# Altium PCB Cookie_Template.pcbdoc
Units mm, origin at the board's own origin, x right, y up, seen from the top; angles counter-clockwise.
Board outline 60.34 x 40.36 mm, 2 copper layers (Top Layer, Bottom Layer); 2 components, 108 nets, 244 pads, 120 vias.
Unrouted connection lines stored in the file: 4.
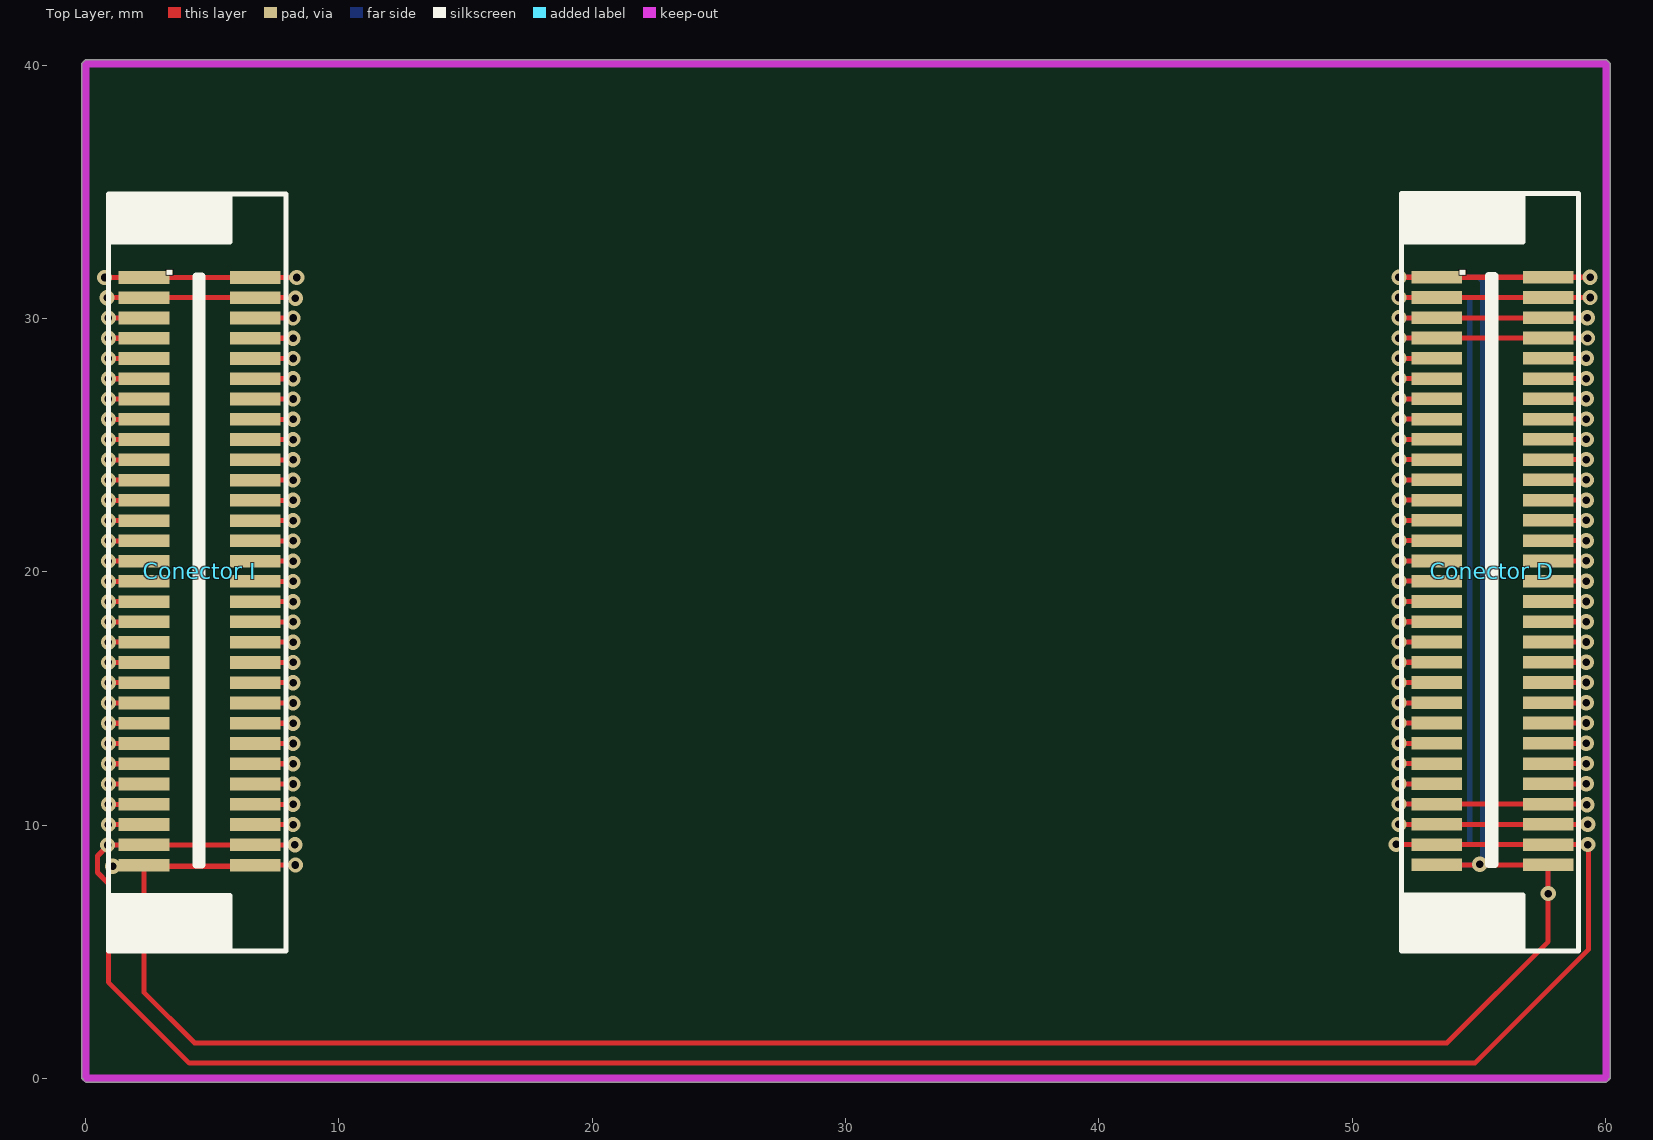
[diagram p0: Top Layer view]
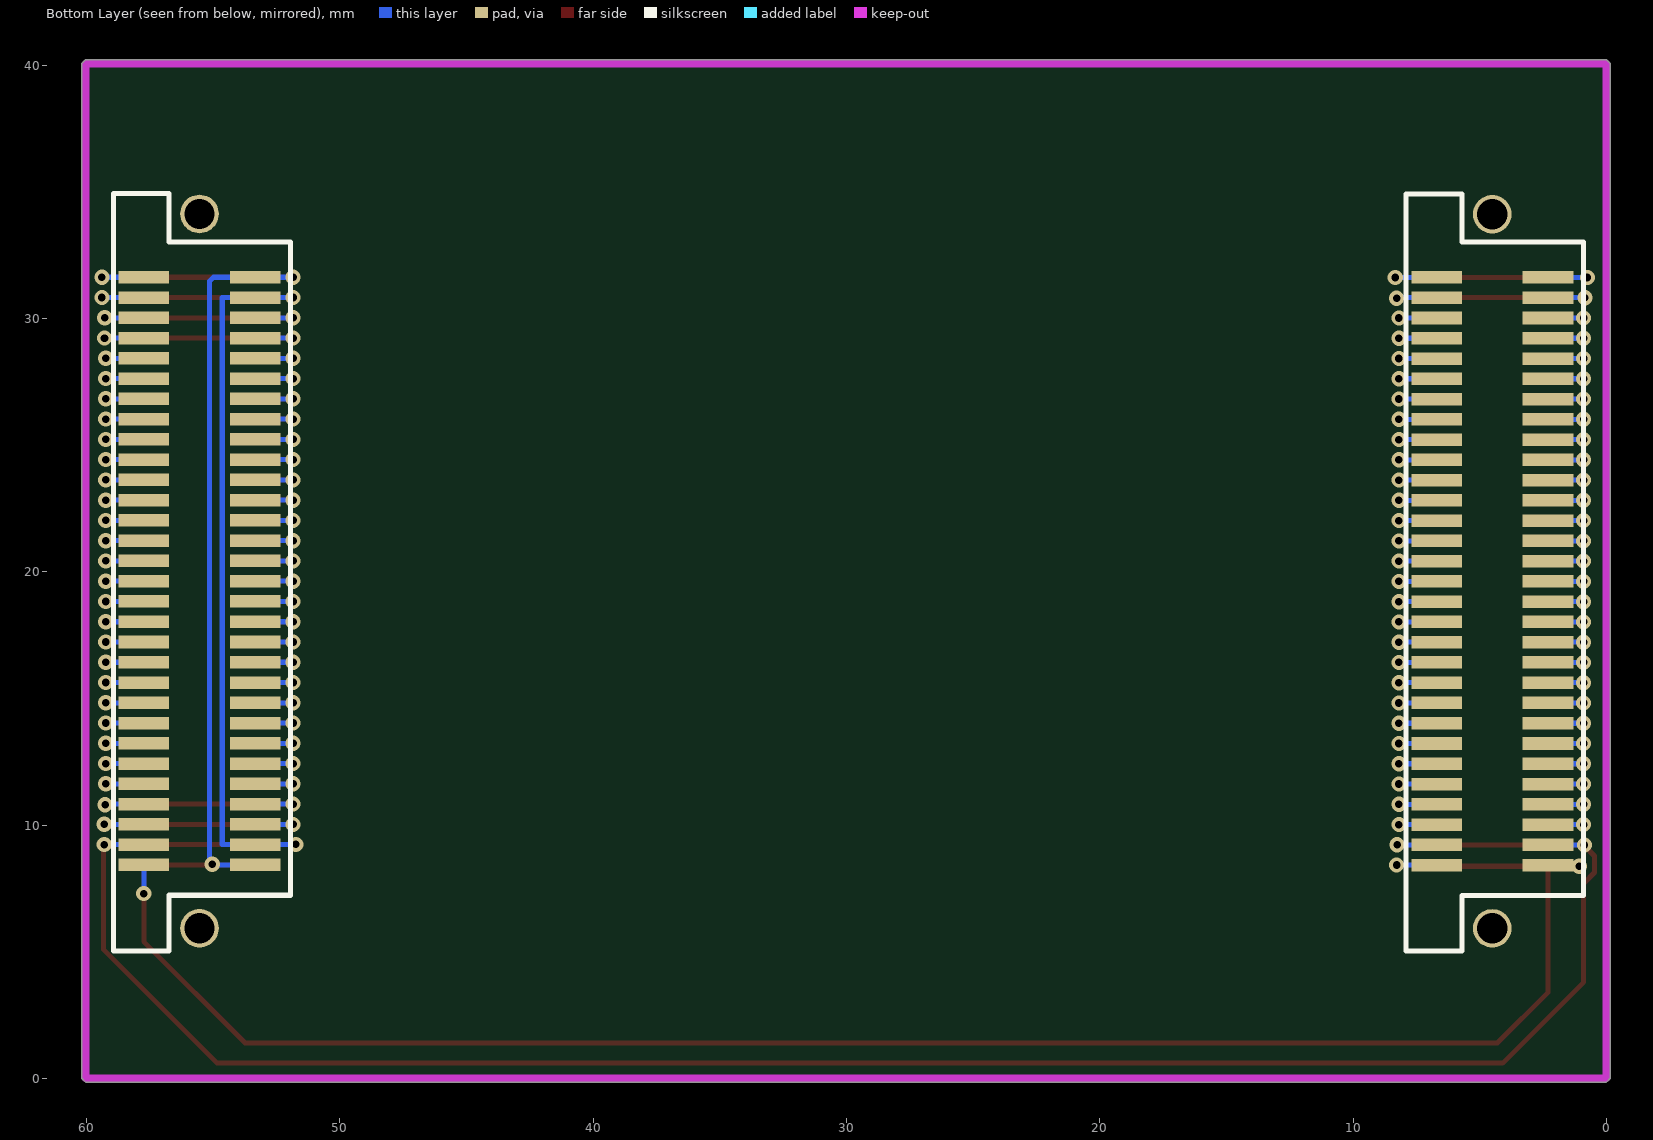
[diagram p1: Bottom Layer view, seen from below]

## Layer stack, top to bottom
Top Solder: solder mask 0.0102, Solder Resist, Dk 3.5
Top Layer: signal copper 0.0356
Dielectric1: dielectric 0.32, FR-4, Dk 4.8
Bottom Layer: signal copper 0.0356
Bottom Solder: solder mask 0.0102, Solder Resist, Dk 3.5

## Board outline
-0.15,0 0,-0.15 60.044,-0.15 60.194,0 60.194,40.063 60.044,40.213 0,40.213 -0.15,40.063

## Design rules (kind name [scope] priority, off if disabled: settings)
Clearance Clearance_2 [OnLayer('Bottom Layer') And (IsThruPin Or IsSMTPin Or IsWire) vs OnLayer('Bottom Layer') And (IsThruPin Or IsSMTPin Or IsWire Or IsVia)] p1: gap=0.2 ignorepadtopadclearanceinfootprint=FALSE except(0: Arc-Hole Track-Hole SMDPad-Hole THPad-Hole Via-Hole Fill-Hole Poly-Hole Region-Hole Text-Hole)
Clearance Clearance_1 [OnLayer('Top Layer') And (IsThruPin Or IsSMTPin Or IsWire Or IsVia) vs OnLayer('Top Layer') And (IsThruPin Or IsSMTPin Or IsWire Or IsVia)] p2: gap=0.2 ignorepadtopadclearanceinfootprint=FALSE except(0: Arc-Hole Track-Hole SMDPad-Hole THPad-Hole Via-Hole Fill-Hole Poly-Hole Region-Hole Text-Hole)
Clearance [All] p3: gap=0.15 ignorepadtopadclearanceinfootprint=FALSE except(0: Arc-Hole Track-Hole SMDPad-Hole THPad-Hole Via-Hole Fill-Hole Poly-Hole Region-Hole Text-Hole)
PlaneConnect [All] p1: planeconnectstyle=Relief reliefexpansion=0.635 reliefentries=4 reliefconductorwidth=0.305 reliefairgap=0.254
PolygonConnect [All] p1: connectstyle=Relief reliefconductorwidth=0.254 reliefentries=4 polygonreliefangle="90 Angle" airgapwidth=0.254
RoutingVias [All] p1: holewidth=0.711 width=1.27 viastyle="Through Hole" minholewidth=0.711 minwidth=1.27 maxholewidth=0.711 maxwidth=1.27
SolderMaskExpansion [All] p1: expansion=0 istentingtop=FALSE
Width Net_Width_8 [InNet('N76831')] p1: maxlimit=0.005 minlimit=0.005 preferedwidth=0.005
Width Net_Width_7 [InNet('I51') Or InNet('I52') Or InNet('I53') Or InNet('I54') Or InNet('I55') Or InNet('I56') Or InNet('I57') Or InNet('I58')] p2: maxlimit=0.2 minlimit=0.2 preferedwidth=0.2
Width Net_Width_6 [InNet('I35') Or InNet('I36') Or InNet('I37') Or InNet('I38') Or InNet('I39') Or InNet('I40') Or InNet('I41') Or InNet('I42') Or InNet('I43') Or InNet('I44') Or InNet('I45') Or InNet('I46') Or InNet('I47') Or InNet('I48') Or InNet('I49') Or InNet('I50')] p3: maxlimit=0.2 minlimit=0.2 preferedwidth=0.2
Width Net_Width_5 [InNet('I15') Or InNet('I16') Or InNet('I17') Or InNet('I18') Or InNet('I19') Or InNet('I20') Or InNet('I21') Or InNet('I22') Or InNet('I23') Or InNet('I24') Or InNet('I25') Or InNet('I26') Or InNet('I27') Or InNet('I28') Or InNet('I33') Or InNet('I34')] p4: maxlimit=0.2 minlimit=0.2 preferedwidth=0.2
Width Net_Width_4 [InNet('D55') Or InNet('D56') Or InNet('DGND') Or InNet('DVDD') Or InNet('I3') Or InNet('I4') Or InNet('I5') Or InNet('I6') Or InNet('I7') Or InNet('I8') Or InNet('I9') Or InNet('I10') Or InNet('I11') Or InNet('I12') Or InNet('I13') Or InNet('I14')] p5: maxlimit=0.2 minlimit=0.2 preferedwidth=0.2
Width Net_Width_3 [InNet('D39') Or InNet('D40') Or InNet('D41') Or InNet('D42') Or InNet('D43') Or InNet('D44') Or InNet('D45') Or InNet('D46') Or InNet('D47') Or InNet('D48') Or InNet('D49') Or InNet('D50') Or InNet('D51') Or InNet('D52') Or InNet('D53') Or InNet('D54')] p6: maxlimit=0.2 minlimit=0.2 preferedwidth=0.2
Width Net_Width_2 [InNet('D17') Or InNet('D18') Or InNet('D19') Or InNet('D20') Or InNet('D21') Or InNet('D22') Or InNet('D23') Or InNet('D24') Or InNet('D25') Or InNet('D26') Or InNet('D27') Or InNet('D28') Or InNet('D35') Or InNet('D36') Or InNet('D37') Or InNet('D38')] p7: maxlimit=0.2 minlimit=0.2 preferedwidth=0.2
Width Net_Width_1 [InNet('AGND') Or InNet('AVDD') Or InNet('D3') Or InNet('D4') Or InNet('D5') Or InNet('D6') Or InNet('D7') Or InNet('D8') Or InNet('D9') Or InNet('D10') Or InNet('D11') Or InNet('D12') Or InNet('D13') Or InNet('D14') Or InNet('D15') Or InNet('D16')] p8: maxlimit=0.2 minlimit=0.2 preferedwidth=0.2
Width [All] p9: maxlimit=0.203 minlimit=0.203 preferedwidth=0.203
29 further rules are at their usual default settings.

## Components (designator, comment, footprint, x,y, rotation, side; value= is the part's Value field where it differs from the comment)
"Conector D" "Cookie_Connector" COOKIECON_HEADER_AND_SOCKET 53.347,31.626 r270 top
"Conector I" "Cookie_Connector" COOKIECON_HEADER_AND_SOCKET 2.305,31.619 r270 top

## Footprints (in the part's own frame and the unit in brackets; to place one, negate y for a bottom-side part, rotate by r counter-clockwise, add the part's x,y. Pads: shape width x height; smd on the part's side, far side on the other; paste and mask are expansions set on the pad)
COOKIECON_HEADER_AND_SOCKET [mil]
  rect 19.63x78.73 smd: 1(0,0) 2(31.48,0) 3(63,0) 4(94.48,0) 5(126,0) 6(157.47,0) 7(188.97,0) 8(220.47,0) 9(251.97,0) 10(283.45,0) 11(314.95,0) 12(346.45,0) 13(377.95,0) 14(409.43,0) 15(440.93,0) 16(472.43,0) 17(503.93,0) 18(535.42,0) 19(566.92,0) 20(598.42,0) 21(629.92,0) 22(661.42,0) 23(692.9,0) 24(724.4,0) 25(755.9,0) 26(787.4,0) 27(818.88,0) 28(850.38,0) 29(881.88,0) 30(913.38,0) 31(913.38,173.22) 32(881.88,173.22) 33(850.38,173.22) 34(818.88,173.22) 35(787.4,173.22) 36(755.9,173.22) 37(724.4,173.22) 38(692.9,173.22) 39(661.42,173.22) 40(629.92,173.22) 41(598.42,173.22) 42(566.92,173.22) 43(535.42,173.22) 44(503.93,173.22) 45(472.43,173.22) 46(440.93,173.22) 47(409.43,173.22) 48(377.95,173.22) 49(346.45,173.22) 50(314.95,173.22) 51(283.45,173.22) 52(251.97,173.22) 53(220.47,173.22) 54(188.97,173.22) 55(157.47,173.22) 56(126,173.22) 57(94.48,173.22) 58(63,173.22) 59(31.48,173.22) 60(0,173.22)
  rect 19.47x78.73 smd far side: 61(0,173.22) 62(31.48,173.22) 63(63,173.22) 64(94.48,173.22) 65(126,173.22) 66(157.47,173.22) 67(188.97,173.22) 68(220.47,173.22) 69(251.97,173.22) 70(283.45,173.22) 71(314.95,173.22) 72(346.45,173.22) 73(377.95,173.22) 74(409.43,173.22) 75(440.93,173.22) 76(472.43,173.22) 77(503.93,173.22) 78(535.42,173.22) 79(566.92,173.22) 80(598.42,173.22) 81(629.92,173.22) 82(661.42,173.22) 83(692.9,173.22) 84(724.4,173.22) 85(755.9,173.22) 86(787.4,173.22) 87(818.88,173.22) 88(850.38,173.22) 89(881.88,173.22) 90(913.38,173.22) 91(913.38,0) 92(881.88,0) 93(850.38,0) 94(818.88,0) 95(787.4,0) 96(755.9,0) 97(724.4,0) 98(692.9,0) 99(661.42,0) 100(629.92,0) 101(598.42,0) 102(566.92,0) 103(535.42,0) 104(503.93,0) 105(472.43,0) 106(440.93,0) 107(409.43,0) 108(377.95,0) 109(346.45,0) 110(314.95,0) 111(283.45,0) 112(251.97,0) 113(220.47,0) 114(188.97,0) 115(157.47,0) 116(126,0) 117(94.48,0) 118(63,0) 119(31.48,0) 120(0,0)
  round 47.23 / inner round 60 / far side round 60 hole 47.23: 121(1011.8,86.6) 122(-98.42,86.6)
  silkscreen extent -130,-55 1047,220

## Via types
v1: diameter 0.6, hole 0.3, Top Layer to Bottom Layer, 120 vias

## Nets (pads, with @x,y where several pads share a name; then routed paths per layer and width w, separated by ;. In a path a pad name is that pad's centre, name@x,y a point inside that pad or via, vN(x,y) a via of type N, cw(c..) or ccw(c..) an arc to the next point about the centre after c; other vN are vias at no path point)
AGND: "Conector I.1" "Conector I.60" "Conector I.61" "Conector I.120" | length 10.8
  Top Layer w0.2: v1(0.751,31.619) 2.305,31.619 6.705,31.619 v1(8.341,31.619)
  Bottom Layer w0.2: v1(0.751,31.619) 2.305,31.619 ; 6.705,31.619 v1(8.341,31.619)
AVDD: "Conector I.2" "Conector I.59" "Conector I.62" "Conector I.119" | length 10.6
  Top Layer w0.2: v1(0.847,30.819) 2.305,30.819 6.705,30.819 8.303,30.819 v1(8.284,30.8)
  Bottom Layer w0.2: v1(0.847,30.819) 2.305,30.819 2.35,30.819 ; 6.705,30.819 v1@8.303,30.819 ; v1(8.284,30.8) v1@8.303,30.819 ; v1@8.328,30.819 v1@8.303,30.819
D3: "Conector D.3" "Conector D.118" | length 10.5
  Top Layer w0.2: v1(51.852,30.026) 53.347,30.026 v1(59.284,30.026)
  Bottom Layer w0.2: v1(51.852,30.026) 53.347,30.026 ; 57.746,30.026 v1(59.284,30.026)
D4: "Conector D.4" "Conector D.117" | length 10.5
  Top Layer w0.2: v1(51.852,29.227) 53.347,29.227 v1(59.296,29.227)
  Bottom Layer w0.2: v1(51.852,29.227) 53.347,29.227 ; 57.746,29.227 v1(59.296,29.227)
D5: "Conector D.5" "Conector D.116" | length 3
  Top Layer w0.2: v1(51.852,28.426) 53.347,28.426
  Bottom Layer w0.2: v1(51.852,28.426) 53.347,28.426
D6: "Conector D.6" "Conector D.115" | length 3
  Top Layer w0.2: v1(51.852,27.627) 53.347,27.627
  Bottom Layer w0.2: v1(51.852,27.627) 53.347,27.627
D7: "Conector D.7" "Conector D.114" | length 3
  Top Layer w0.2: v1(51.852,26.827) 53.347,26.827
  Bottom Layer w0.2: v1(51.852,26.827) 53.347,26.827
D8: "Conector D.8" "Conector D.113" | length 3
  Top Layer w0.2: v1(51.852,26.027) 53.347,26.027
  Bottom Layer w0.2: v1(51.852,26.027) 53.347,26.027
D9: "Conector D.9" "Conector D.112" | length 3
  Top Layer w0.2: v1(51.852,25.226) 53.347,25.226
  Bottom Layer w0.2: v1(51.852,25.226) 53.347,25.226
D10: "Conector D.10" "Conector D.111" | length 3
  Top Layer w0.2: v1(51.852,24.427) 53.347,24.427
  Bottom Layer w0.2: v1(51.852,24.427) 53.347,24.427
D11: "Conector D.11" "Conector D.110" | length 3
  Top Layer w0.2: v1(51.852,23.627) 53.347,23.627
  Bottom Layer w0.2: v1(51.852,23.627) 53.347,23.627
D12: "Conector D.12" "Conector D.109" | length 3
  Top Layer w0.2: v1(51.852,22.827) 53.347,22.827
  Bottom Layer w0.2: v1(51.852,22.827) 53.347,22.827
D13: "Conector D.13" "Conector D.108" | length 3
  Top Layer w0.2: v1(51.852,22.026) 53.347,22.026
  Bottom Layer w0.2: v1(51.852,22.026) 53.347,22.026
D14: "Conector D.14" "Conector D.107" | length 3
  Top Layer w0.2: v1(51.852,21.227) 53.347,21.227
  Bottom Layer w0.2: v1(51.852,21.227) 53.347,21.227
D15: "Conector D.15" "Conector D.106" | length 3
  Top Layer w0.2: v1(51.852,20.427) 53.347,20.427
  Bottom Layer w0.2: v1(51.852,20.427) 53.347,20.427
D16: "Conector D.16" "Conector D.105" | length 3
  Top Layer w0.2: v1(51.852,19.627) 53.347,19.627
  Bottom Layer w0.2: v1(51.852,19.627) 53.347,19.627
D17: "Conector D.17" "Conector D.104" | length 3
  Top Layer w0.2: v1(51.852,18.826) 53.347,18.826
  Bottom Layer w0.2: v1(51.852,18.826) 53.347,18.826
D18: "Conector D.18" "Conector D.103" | length 3
  Top Layer w0.2: v1(51.852,18.027) 53.347,18.027
  Bottom Layer w0.2: v1(51.852,18.027) 53.347,18.027
D19: "Conector D.19" "Conector D.102" | length 3
  Top Layer w0.2: v1(51.852,17.227) 53.347,17.227
  Bottom Layer w0.2: v1(51.852,17.227) 53.347,17.227
D20: "Conector D.20" "Conector D.101" | length 3
  Top Layer w0.2: v1(51.852,16.427) 53.347,16.427
  Bottom Layer w0.2: v1(51.852,16.427) 53.347,16.427
D21: "Conector D.21" "Conector D.100" | length 3
  Top Layer w0.2: v1(51.852,15.627) 53.347,15.627
  Bottom Layer w0.2: v1(51.852,15.627) 53.347,15.627
D22: "Conector D.22" "Conector D.99" | length 3
  Top Layer w0.2: v1(51.852,14.826) 53.347,14.826
  Bottom Layer w0.2: v1(51.852,14.826) 53.347,14.826
D23: "Conector D.23" "Conector D.98" | length 3
  Top Layer w0.2: v1(51.852,14.027) 53.347,14.027
  Bottom Layer w0.2: v1(51.852,14.027) 53.347,14.027
D24: "Conector D.24" "Conector D.97" | length 3
  Top Layer w0.2: v1(51.852,13.227) 53.347,13.227
  Bottom Layer w0.2: v1(51.852,13.227) 53.347,13.227
D25: "Conector D.25" "Conector D.96" | length 3
  Top Layer w0.2: v1(51.852,12.427) 53.347,12.427
  Bottom Layer w0.2: v1(51.852,12.427) 53.347,12.427
D26: "Conector D.26" "Conector D.95" | length 3
  Top Layer w0.2: v1(51.852,11.626) 53.347,11.626
  Bottom Layer w0.2: v1(51.852,11.626) 53.347,11.626
D27: "Conector D.27" "Conector D.94" | length 10.5
  Top Layer w0.2: v1(51.852,10.827) 53.347,10.827 59.243,10.827 v1(59.272,10.798)
  Bottom Layer w0.2: v1(51.852,10.827) 53.347,10.827 ; 57.746,10.827 59.243,10.827 v1(59.272,10.798)
D28: "Conector D.28" "Conector D.93" | length 10.5
  Top Layer w0.2: v1(51.852,10.027) 53.347,10.027 59.301,10.027 v1(59.305,10.031)
  Bottom Layer w0.2: v1(51.852,10.027) 53.347,10.027 ; 57.746,10.027 59.301,10.027 v1(59.305,10.031)
D33: "Conector D.33" "Conector D.88"
D34: "Conector D.34" "Conector D.87"
D35: "Conector D.35" "Conector D.86" | length 3
  Top Layer w0.2: 57.746,11.626 v1(59.245,11.626)
  Bottom Layer w0.2: 57.746,11.626 v1(59.245,11.626)
D36: "Conector D.36" "Conector D.85" | length 3
  Top Layer w0.2: 57.746,12.427 v1(59.245,12.427)
  Bottom Layer w0.2: 57.746,12.427 v1(59.245,12.427)
D37: "Conector D.37" "Conector D.84" | length 3
  Top Layer w0.2: 57.746,13.227 v1(59.245,13.227)
  Bottom Layer w0.2: 57.746,13.227 v1(59.245,13.227)
D38: "Conector D.38" "Conector D.83" | length 3
  Top Layer w0.2: 57.746,14.027 v1(59.245,14.027)
  Bottom Layer w0.2: 57.746,14.027 v1(59.245,14.027)
D39: "Conector D.39" "Conector D.82" | length 3
  Top Layer w0.2: 57.746,14.826 v1(59.245,14.826)
  Bottom Layer w0.2: 57.746,14.826 v1(59.245,14.826)
D40: "Conector D.40" "Conector D.81" | length 3
  Top Layer w0.2: 57.746,15.627 v1(59.245,15.627)
  Bottom Layer w0.2: 57.746,15.627 v1(59.245,15.627)
D41: "Conector D.41" "Conector D.80" | length 3
  Top Layer w0.2: 57.746,16.427 v1(59.245,16.427)
  Bottom Layer w0.2: 57.746,16.427 v1(59.245,16.427)
D42: "Conector D.42" "Conector D.79" | length 3
  Top Layer w0.2: 57.746,17.227 v1(59.245,17.227)
  Bottom Layer w0.2: 57.746,17.227 v1(59.245,17.227)
D43: "Conector D.43" "Conector D.78" | length 3
  Top Layer w0.2: 57.746,18.027 v1(59.245,18.027)
  Bottom Layer w0.2: 57.746,18.027 v1(59.245,18.027)
D44: "Conector D.44" "Conector D.77" | length 3
  Top Layer w0.2: 57.746,18.826 v1(59.245,18.826)
  Bottom Layer w0.2: 57.746,18.826 v1(59.245,18.826)
D45: "Conector D.45" "Conector D.76" | length 3
  Top Layer w0.2: 57.746,19.627 v1(59.245,19.627)
  Bottom Layer w0.2: 57.746,19.627 v1(59.245,19.627)
D46: "Conector D.46" "Conector D.75" | length 3
  Top Layer w0.2: 57.746,20.427 v1(59.245,20.427)
  Bottom Layer w0.2: 57.746,20.427 v1(59.245,20.427)
D47: "Conector D.47" "Conector D.74" | length 3
  Top Layer w0.2: 57.746,21.227 v1(59.245,21.227)
  Bottom Layer w0.2: 57.746,21.227 v1(59.245,21.227)
D48: "Conector D.48" "Conector D.73" | length 3
  Top Layer w0.2: 57.746,22.026 v1(59.245,22.026)
  Bottom Layer w0.2: 57.746,22.026 v1(59.245,22.026)
D49: "Conector D.49" "Conector D.72" | length 3
  Top Layer w0.2: 57.746,22.827 v1(59.245,22.827)
  Bottom Layer w0.2: 57.746,22.827 v1(59.245,22.827)
D50: "Conector D.50" "Conector D.71" | length 3
  Top Layer w0.2: 57.746,23.627 v1(59.245,23.627)
  Bottom Layer w0.2: 57.746,23.627 v1(59.245,23.627)
D51: "Conector D.51" "Conector D.70" | length 3
  Top Layer w0.2: 57.746,24.427 v1(59.245,24.427)
  Bottom Layer w0.2: 57.746,24.427 v1(59.245,24.427)
D52: "Conector D.52" "Conector D.69" | length 3
  Top Layer w0.2: 57.746,25.226 v1(59.245,25.226)
  Bottom Layer w0.2: 57.746,25.226 v1(59.245,25.226)
D53: "Conector D.53" "Conector D.68" | length 3
  Top Layer w0.2: 57.746,26.027 v1(59.245,26.027)
  Bottom Layer w0.2: 57.746,26.027 v1(59.245,26.027)
D54: "Conector D.54" "Conector D.67" | length 3
  Top Layer w0.2: 57.746,26.827 v1(59.245,26.827)
  Bottom Layer w0.2: 57.746,26.827 v1(59.245,26.827)
D55: "Conector D.55" "Conector D.66" | length 3
  Top Layer w0.2: 57.746,27.627 v1(59.245,27.627)
  Bottom Layer w0.2: 57.746,27.627 v1(59.245,27.627)
D56: "Conector D.56" "Conector D.65" | length 3
  Top Layer w0.2: 57.746,28.426 v1(59.245,28.426)
  Bottom Layer w0.2: 57.746,28.426 v1(59.245,28.426)
D57: "Conector D.57" "Conector D.64"
D58: "Conector D.58" "Conector D.63"
DGND: "Conector D.1" "Conector D.30" "Conector D.31" "Conector D.60" "Conector D.61" "Conector D.90" "Conector D.91" "Conector D.120" "Conector I.30" "Conector I.31" "Conector I.90" "Conector I.91" | length 119.1
  Top Layer w0.2: v1(1.07,8.372) 2.258,8.372 ; v1(8.284,8.423) 8.28,8.419 6.705,8.419 6.658,8.372 2.305,8.372 ; v1(51.852,31.626) 53.347,31.626 57.746,31.626 v1(59.4,31.626) ; 53.347,8.426 55.024,8.426 v1(55.045,8.448) 55.071,8.423 56.163,8.423 56.167,8.426 57.746,8.426 v1(57.746,7.294) 57.746,5.395 53.75,1.399 4.296,1.399 2.298,3.397 2.298,7.093 2.305,7.101 2.305,8.372 ; 2.258,8.372 2.305,8.419 2.305,8.372 ; 2.258,8.372 2.305,8.372
  Bottom Layer w0.2: v1(1.07,8.372) 2.258,8.372 2.305,8.419 ; 6.705,8.419 8.28,8.419 v1(8.284,8.423) ; v1(51.852,31.626) 53.347,31.626 54.993,31.626 55.148,31.471 55.148,8.551 v1(55.045,8.448) 55.067,8.426 53.347,8.426 ; v1(57.746,7.294) 57.746,8.426 ; 57.746,31.626 v1(59.4,31.626)
DVDD: "Conector D.2" "Conector D.29" "Conector D.32" "Conector D.59" "Conector D.62" "Conector D.89" "Conector D.92" "Conector D.119" "Conector I.29" "Conector I.32" "Conector I.89" "Conector I.92" | length 129.1
  Top Layer w0.2: v1(0.867,9.21) v1@0.899,9.21 ; v1(8.265,9.219) 6.705,9.219 2.305,9.219 ; v1(51.743,9.235) 51.734,9.227 53.347,9.227 57.746,9.227 v1(59.309,9.227) 59.345,9.227 59.345,5.095 54.849,0.599 4.096,0.599 0.899,3.796 0.899,7.69 0.467,8.122 0.467,8.778 v1@0.899,9.21 ; v1(51.852,30.827) 53.347,30.827 57.746,30.827 v1(59.4,30.827) ; v1@0.899,9.21 2.296,9.21 2.305,9.219 ; v1@0.899,9.21 0.899,9.219 2.305,9.219
  Bottom Layer w0.2: v1(0.867,9.21) 0.876,9.219 2.305,9.219 ; 6.705,9.219 v1(8.265,9.219) ; v1(51.743,9.235) 51.734,9.227 53.347,9.227 54.649,9.227 54.649,30.827 53.347,30.827 v1(51.852,30.827) ; 57.746,9.227 v1(59.309,9.227) ; 57.746,30.827 v1(59.4,30.827)
I3: "Conector I.3" "Conector I.118" | length 2.8
  Top Layer w0.2: v1(0.899,30.019) 2.305,30.019
  Bottom Layer w0.2: v1(0.899,30.019) 2.305,30.019
I4: "Conector I.4" "Conector I.117" | length 2.8
  Top Layer w0.2: v1(0.899,29.219) 2.305,29.219
  Bottom Layer w0.2: v1(0.899,29.219) 2.305,29.219
I5: "Conector I.5" "Conector I.116" | length 2.8
  Top Layer w0.2: v1(0.899,28.418) 2.305,28.418
  Bottom Layer w0.2: v1(0.899,28.418) 2.305,28.418
I6: "Conector I.6" "Conector I.115" | length 2.8
  Top Layer w0.2: v1(0.899,27.619) 2.305,27.619
  Bottom Layer w0.2: v1(0.899,27.619) 2.305,27.619
I7: "Conector I.7" "Conector I.114" | length 2.8
  Top Layer w0.2: v1(0.899,26.819) 2.305,26.819
  Bottom Layer w0.2: v1(0.899,26.819) 2.305,26.819
I8: "Conector I.8" "Conector I.113" | length 2.8
  Top Layer w0.2: v1(0.899,26.019) 2.305,26.019
  Bottom Layer w0.2: v1(0.899,26.019) 2.305,26.019
I9: "Conector I.9" "Conector I.112" | length 2.8
  Top Layer w0.2: v1(0.899,25.219) 2.305,25.219
  Bottom Layer w0.2: v1(0.899,25.219) 2.305,25.219
I10: "Conector I.10" "Conector I.111" | length 2.8
  Top Layer w0.2: v1(0.899,24.419) 2.305,24.419
  Bottom Layer w0.2: v1(0.899,24.419) 2.305,24.419
I11: "Conector I.11" "Conector I.110" | length 2.8
  Top Layer w0.2: v1(0.899,23.619) 2.305,23.619
  Bottom Layer w0.2: v1(0.899,23.619) 2.305,23.619
I12: "Conector I.12" "Conector I.109" | length 2.8
  Top Layer w0.2: v1(0.899,22.819) 2.305,22.819
  Bottom Layer w0.2: v1(0.899,22.819) 2.305,22.819
I13: "Conector I.13" "Conector I.108" | length 2.8
  Top Layer w0.2: v1(0.899,22.019) 2.305,22.019
  Bottom Layer w0.2: v1(0.899,22.019) 2.305,22.019
I14: "Conector I.14" "Conector I.107" | length 2.8
  Top Layer w0.2: v1(0.899,21.219) 2.305,21.219
  Bottom Layer w0.2: v1(0.899,21.219) 2.305,21.219
I15: "Conector I.15" "Conector I.106" | length 2.8
  Top Layer w0.2: v1(0.899,20.419) 2.305,20.419
  Bottom Layer w0.2: v1(0.899,20.419) 2.305,20.419
I16: "Conector I.16" "Conector I.105" | length 2.8
  Top Layer w0.2: v1(0.899,19.619) 2.305,19.619
  Bottom Layer w0.2: v1(0.899,19.619) 2.305,19.619
I17: "Conector I.17" "Conector I.104" | length 2.8
  Top Layer w0.2: v1(0.899,18.819) 2.305,18.819
  Bottom Layer w0.2: v1(0.899,18.819) 2.305,18.819
I18: "Conector I.18" "Conector I.103" | length 2.8
  Top Layer w0.2: v1(0.899,18.019) 2.305,18.019
  Bottom Layer w0.2: v1(0.899,18.019) 2.305,18.019
I19: "Conector I.19" "Conector I.102" | length 2.8
  Top Layer w0.2: v1(0.899,17.219) 2.305,17.219
  Bottom Layer w0.2: v1(0.899,17.219) 2.305,17.219
I20: "Conector I.20" "Conector I.101" | length 2.8
  Top Layer w0.2: v1(0.899,16.419) 2.305,16.419
  Bottom Layer w0.2: v1(0.899,16.419) 2.305,16.419
I21: "Conector I.21" "Conector I.100" | length 2.8
  Top Layer w0.2: v1(0.899,15.619) 2.305,15.619
  Bottom Layer w0.2: v1(0.899,15.619) 2.305,15.619
I22: "Conector I.22" "Conector I.99" | length 2.8
  Top Layer w0.2: v1(0.899,14.819) 2.305,14.819
  Bottom Layer w0.2: v1(0.899,14.819) 2.305,14.819
I23: "Conector I.23" "Conector I.98" | length 2.8
  Top Layer w0.2: v1(0.899,14.019) 2.305,14.019
  Bottom Layer w0.2: v1(0.899,14.019) 2.305,14.019
I24: "Conector I.24" "Conector I.97" | length 2.8
  Top Layer w0.2: v1(0.899,13.219) 2.305,13.219
  Bottom Layer w0.2: v1(0.899,13.219) 2.305,13.219
I25: "Conector I.25" "Conector I.96" | length 2.8
  Top Layer w0.2: v1(0.899,12.419) 2.305,12.419
  Bottom Layer w0.2: v1(0.899,12.419) 2.305,12.419
I26: "Conector I.26" "Conector I.95" | length 2.8
  Top Layer w0.2: v1(0.899,11.619) 2.305,11.619
  Bottom Layer w0.2: v1(0.899,11.619) 2.305,11.619
I27: "Conector I.27" "Conector I.94" | length 2.8
  Top Layer w0.2: v1(0.899,10.819) 2.305,10.819
  Bottom Layer w0.2: v1(0.899,10.819) 2.305,10.819
I28: "Conector I.28" "Conector I.93" | length 2.8
  Top Layer w0.2: v1(0.899,10.019) 2.305,10.019
  Bottom Layer w0.2: v1(0.899,10.019) 2.305,10.019
I33: "Conector I.33" "Conector I.88" | length 3
  Top Layer w0.2: 6.705,10.019 v1(8.192,10.019)
  Bottom Layer w0.2: 6.705,10.019 v1(8.192,10.019)
I34: "Conector I.34" "Conector I.87" | length 3
  Top Layer w0.2: 6.705,10.819 v1(8.192,10.819)
  Bottom Layer w0.2: 6.705,10.819 v1(8.192,10.819)
I35: "Conector I.35" "Conector I.86" | length 3
  Top Layer w0.2: 6.705,11.619 v1(8.192,11.619)
  Bottom Layer w0.2: 6.705,11.619 v1(8.192,11.619)
I36: "Conector I.36" "Conector I.85" | length 3
  Top Layer w0.2: 6.705,12.419 v1(8.192,12.419)
  Bottom Layer w0.2: 6.705,12.419 v1(8.192,12.419)
I37: "Conector I.37" "Conector I.84" | length 3
  Top Layer w0.2: 6.705,13.219 v1(8.192,13.219)
  Bottom Layer w0.2: 6.705,13.219 v1(8.192,13.219)
I38: "Conector I.38" "Conector I.83" | length 3
  Top Layer w0.2: 6.705,14.019 v1(8.192,14.019)
  Bottom Layer w0.2: 6.705,14.019 v1(8.192,14.019)
I39: "Conector I.39" "Conector I.82" | length 3
  Top Layer w0.2: 6.705,14.819 v1(8.192,14.819)
  Bottom Layer w0.2: 6.705,14.819 v1(8.192,14.819)
I40: "Conector I.40" "Conector I.81" | length 3
  Top Layer w0.2: 6.705,15.619 v1(8.192,15.619)
  Bottom Layer w0.2: 6.705,15.619 v1(8.192,15.619)
I41: "Conector I.41" "Conector I.80" | length 3
  Top Layer w0.2: 6.705,16.419 v1(8.192,16.419)
  Bottom Layer w0.2: 6.705,16.419 v1(8.192,16.419)
I42: "Conector I.42" "Conector I.79" | length 3
  Top Layer w0.2: 6.705,17.219 v1(8.192,17.219)
  Bottom Layer w0.2: 6.705,17.219 v1(8.192,17.219)
I43: "Conector I.43" "Conector I.78" | length 3
  Top Layer w0.2: 6.705,18.019 v1(8.192,18.019)
  Bottom Layer w0.2: 6.705,18.019 v1(8.192,18.019)
I44: "Conector I.44" "Conector I.77" | length 3
  Top Layer w0.2: 6.705,18.819 v1(8.192,18.819)
  Bottom Layer w0.2: 6.705,18.819 v1(8.192,18.819)
I45: "Conector I.45" "Conector I.76" | length 3
  Top Layer w0.2: 6.705,19.619 v1(8.192,19.619)
  Bottom Layer w0.2: 6.705,19.619 v1(8.192,19.619)
I46: "Conector I.46" "Conector I.75" | length 3
  Top Layer w0.2: 6.705,20.419 v1(8.192,20.419)
  Bottom Layer w0.2: 6.705,20.419 v1(8.192,20.419)
I47: "Conector I.47" "Conector I.74" | length 3
  Top Layer w0.2: 6.705,21.219 v1(8.192,21.219)
  Bottom Layer w0.2: 6.705,21.219 v1(8.192,21.219)
I48: "Conector I.48" "Conector I.73" | length 3
  Top Layer w0.2: 6.705,22.019 v1(8.192,22.019)
  Bottom Layer w0.2: 6.705,22.019 v1(8.192,22.019)
I49: "Conector I.49" "Conector I.72" | length 3
  Top Layer w0.2: 6.705,22.819 v1(8.192,22.819)
  Bottom Layer w0.2: 6.705,22.819 v1(8.192,22.819)
I50: "Conector I.50" "Conector I.71" | length 3
  Top Layer w0.2: 6.705,23.619 v1(8.192,23.619)
  Bottom Layer w0.2: 6.705,23.619 v1(8.192,23.619)
I51: "Conector I.51" "Conector I.70" | length 3
  Top Layer w0.2: 6.705,24.419 v1(8.192,24.419)
  Bottom Layer w0.2: 6.705,24.419 v1(8.192,24.419)
I52: "Conector I.52" "Conector I.69" | length 3
  Top Layer w0.2: 6.705,25.219 v1(8.192,25.219)
  Bottom Layer w0.2: 6.705,25.219 v1(8.192,25.219)
I53: "Conector I.53" "Conector I.68" | length 3
  Top Layer w0.2: 6.705,26.019 v1(8.192,26.019)
  Bottom Layer w0.2: 6.705,26.019 v1(8.192,26.019)
I54: "Conector I.54" "Conector I.67" | length 3
  Top Layer w0.2: 6.705,26.819 v1(8.192,26.819)
  Bottom Layer w0.2: 6.705,26.819 v1(8.192,26.819)
I55: "Conector I.55" "Conector I.66" | length 3
  Top Layer w0.2: 6.705,27.619 v1(8.192,27.619)
  Bottom Layer w0.2: 6.705,27.619 v1(8.192,27.619)
I56: "Conector I.56" "Conector I.65" | length 3
  Top Layer w0.2: 6.705,28.418 v1(8.192,28.418)
  Bottom Layer w0.2: 6.705,28.418 v1(8.192,28.418)
I57: "Conector I.57" "Conector I.64" | length 3
  Top Layer w0.2: 6.705,29.219 v1(8.192,29.219)
  Bottom Layer w0.2: 6.705,29.219 v1(8.192,29.219)
I58: "Conector I.58" "Conector I.63" | length 3
  Top Layer w0.2: 6.705,30.019 v1(8.192,30.019)
  Bottom Layer w0.2: 6.705,30.019 v1(8.192,30.019)
pads on no net: "Conector D.121" "Conector D.122" "Conector I.121" "Conector I.122"

## Keep-outs
Keep-Out Layer:
  lines w0.3: 0,0 60.044,0 60.044,40.063 0,40.063 0,0

## Silkscreen, mask and mechanical layers (free items; w line width, h text height)
Drill Drawing:
  lines w0.254: 6.758,-43.268 101.627,-43.268